# EAGLE board Gleisbesetzmeldung (EAGLE 8.1.0)
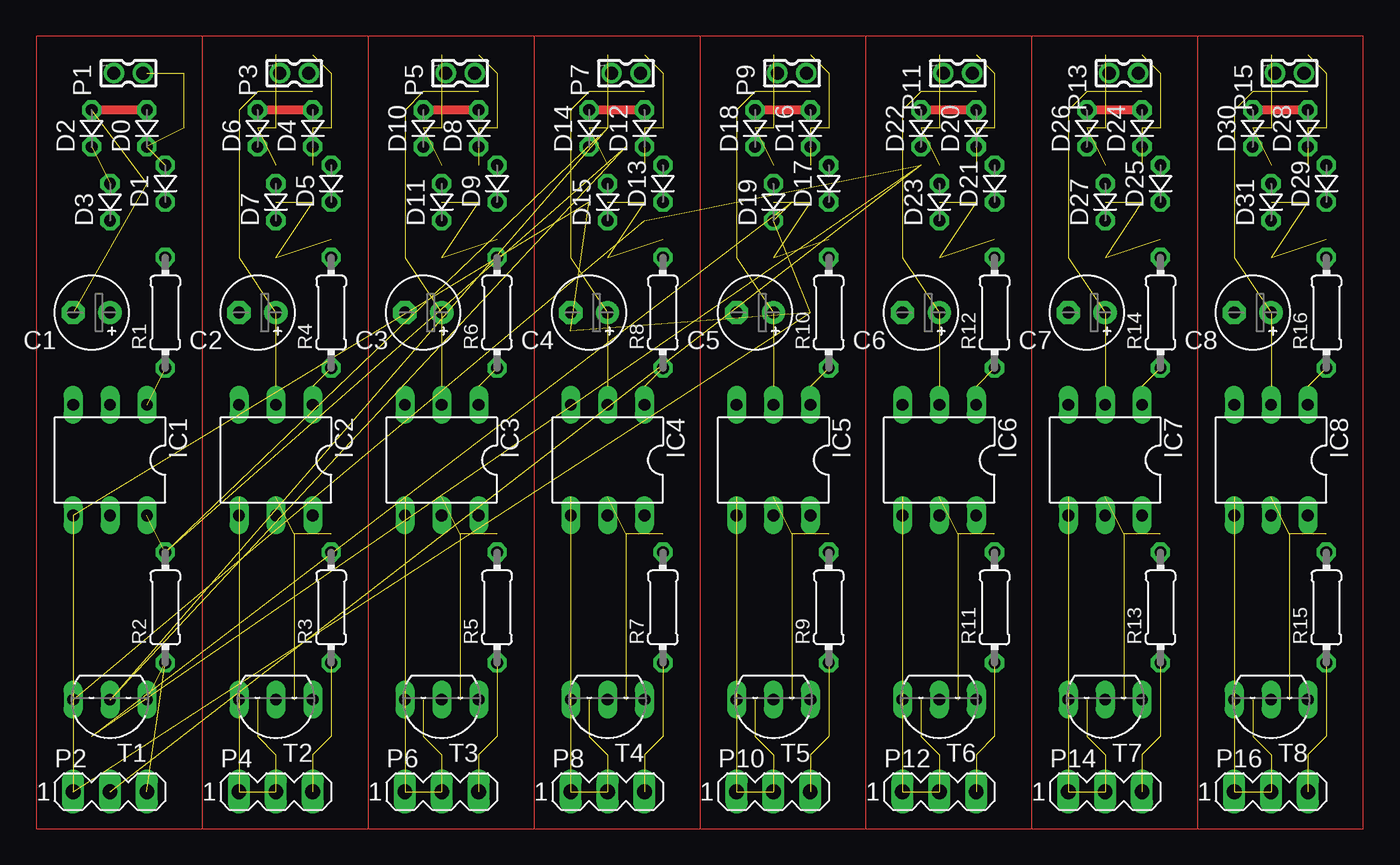
[diagram p0: board, top side]
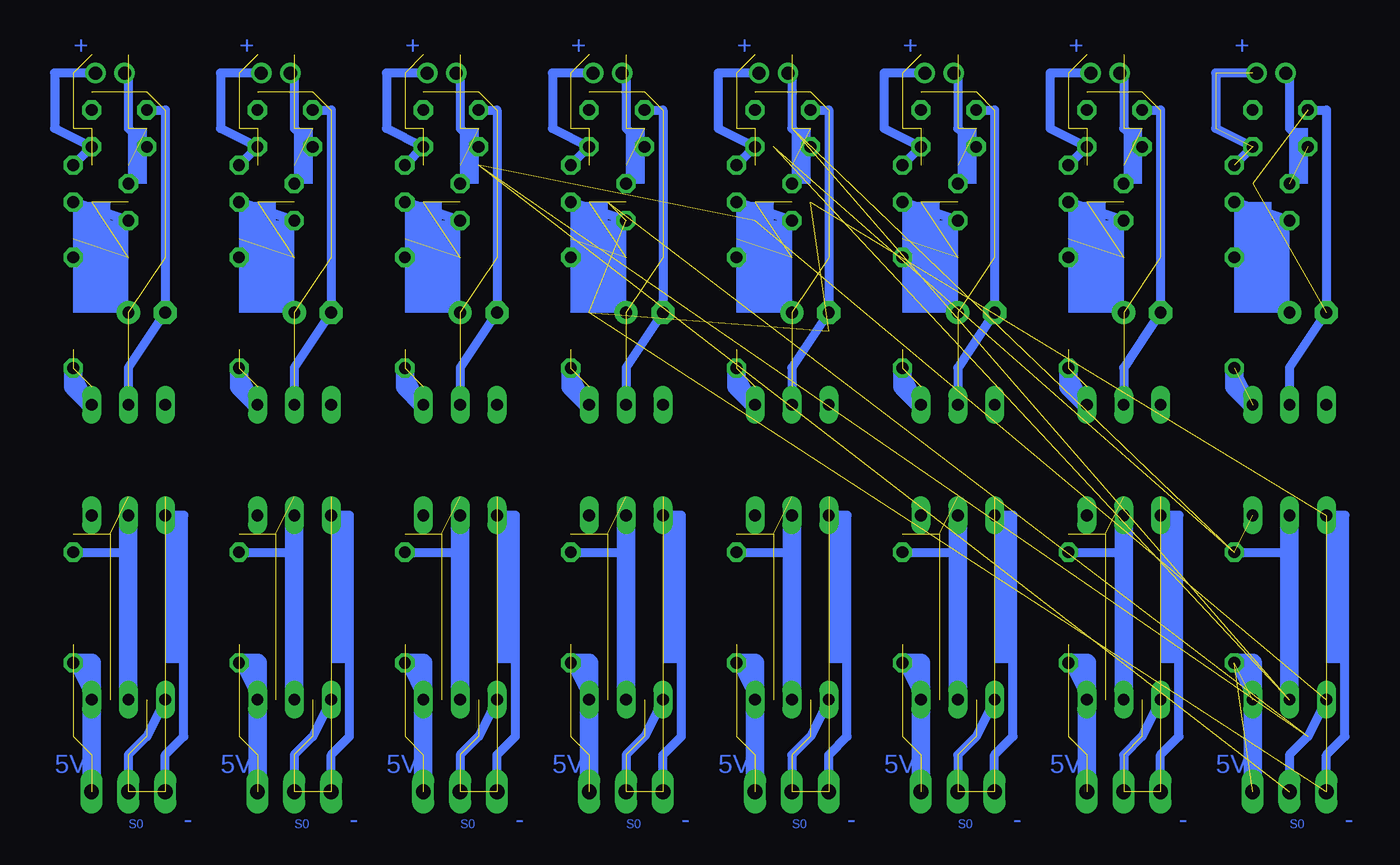
[diagram p1: board, bottom side, seen from below]

No outline drawn. Coordinates in mm, seen from the top.
Copper layers (1*16): Top 0.035mm / dielectric 1.5mm / Bottom 0.035mm
Design rules "default": minimum track width 10mil, minimum drill 24mil, track to track 8mil, track to pad 8mil, pad to pad 8mil, via to via 8mil, smd to smd 8mil, copper to edge 40mil, drill to drill 8mil, minimum pad ring 10mil, minimum via ring 8mil, stop-mask expansion 4mil, vias tented up to drill 0mil, thermal gap 10mil

## Footprints (pad centres in the part's own frame; a part is rotated, then mirrored left to right if it is on the bottom)
E2,5-5 = drill 0.813 pad 1.6: + -1.27,0 | drill 0.813 pad 1.6 octagon: - 1.27,0
D-2.5 = drill 0.813 octagon: A 1.27,0; C -1.27,0
DIL06 = drill 0.813 long: 1 -2.54,-3.81; 2 0,-3.81; 3 2.54,-3.81; 4 2.54,3.81; 5 0,3.81; 6 -2.54,3.81
87758-0216 = drill 0.9 pad 1.27: 1 0,-1; 2 0,1
MA03-1 = drill 1.016 long: 1 -2.54,0; 2 0,0; 3 2.54,0
0204/7 = drill 0.813 octagon: 1 -3.81,0; 2 3.81,0
TO92-CBE = drill 0.813 long: B 0,0; C -2.54,0; E 2.54,0

## Placement (x,y rotation side)
C1  22uF, 35V  [E2,5-5]  3.81,35.56 180 top
C2  22uF, 35V  [E2,5-5]  15.24,35.56 180 top
C3  22uF, 35V  [E2,5-5]  26.67,35.56 180 top
C4  22uF, 35V  [E2,5-5]  38.1,35.56 180 top
C5  22uF, 35V  [E2,5-5]  49.53,35.56 180 top
C6  22uF, 35V  [E2,5-5]  60.96,35.56 180 top
C7  22uF, 35V  [E2,5-5]  72.39,35.56 180 top
C8  22uF, 35V  [E2,5-5]  83.82,35.56 180 top
D0  [D-2.5]  7.62,48.26 90 top
D1  [D-2.5]  8.89,44.45 90 top
D2  [D-2.5]  3.81,48.26 90 top
D3  [D-2.5]  5.08,43.18 90 top
D4  [D-2.5]  19.05,48.26 90 top
D5  [D-2.5]  20.32,44.45 90 top
D6  [D-2.5]  15.24,48.26 90 top
D7  [D-2.5]  16.51,43.18 90 top
D8  [D-2.5]  30.48,48.26 90 top
D9  [D-2.5]  31.75,44.45 90 top
D10  [D-2.5]  26.67,48.26 90 top
D11  [D-2.5]  27.94,43.18 90 top
D12  [D-2.5]  41.91,48.26 90 top
D13  [D-2.5]  43.18,44.45 90 top
D14  [D-2.5]  38.1,48.26 90 top
D15  [D-2.5]  39.37,43.18 90 top
D16  [D-2.5]  53.34,48.26 90 top
D17  [D-2.5]  54.61,44.45 90 top
D18  [D-2.5]  49.53,48.26 90 top
D19  [D-2.5]  50.8,43.18 90 top
D20  [D-2.5]  64.77,48.26 90 top
D21  [D-2.5]  66.04,44.45 90 top
D22  [D-2.5]  60.96,48.26 90 top
D23  [D-2.5]  62.23,43.18 90 top
D24  [D-2.5]  76.2,48.26 90 top
D25  [D-2.5]  77.47,44.45 90 top
D26  [D-2.5]  72.39,48.26 90 top
D27  [D-2.5]  73.66,43.18 90 top
D28  [D-2.5]  87.63,48.26 90 top
D29  [D-2.5]  88.9,44.45 90 top
D30  [D-2.5]  83.82,48.26 90 top
D31  [D-2.5]  85.09,43.18 90 top
IC1  CNY-17-2  [DIL06]  5.08,25.4 180 top
IC2  CNY-17-2  [DIL06]  16.51,25.4 180 top
IC3  CNY-17-2  [DIL06]  27.94,25.4 180 top
IC4  CNY-17-2  [DIL06]  39.37,25.4 180 top
IC5  CNY-17-2  [DIL06]  50.8,25.4 180 top
IC6  CNY-17-2  [DIL06]  62.23,25.4 180 top
IC7  CNY-17-2  [DIL06]  73.66,25.4 180 top
IC8  CNY-17-2  [DIL06]  85.09,25.4 180 top
P1  [87758-0216]  6.35,52.07 270 top
P2  [MA03-1]  5.08,2.54 0 top
P3  [87758-0216]  17.78,52.07 270 top
P4  [MA03-1]  16.51,2.54 0 top
P5  [87758-0216]  29.21,52.07 270 top
P6  [MA03-1]  27.94,2.54 0 top
P7  [87758-0216]  40.64,52.07 270 top
P8  [MA03-1]  39.37,2.54 0 top
P9  [87758-0216]  52.07,52.07 270 top
P10  [MA03-1]  50.8,2.54 0 top
P11  [87758-0216]  63.5,52.07 270 top
P12  [MA03-1]  62.23,2.54 0 top
P13  [87758-0216]  74.93,52.07 270 top
P14  [MA03-1]  73.66,2.54 0 top
P15  [87758-0216]  86.36,52.07 270 top
P16  [MA03-1]  85.09,2.54 0 top
R1  1k  [0204/7]  8.89,35.56 90 top
R2  1k  [0204/7]  8.89,15.24 90 top
R3  1k  [0204/7]  20.32,15.24 90 top
R4  1k  [0204/7]  20.32,35.56 90 top
R5  1k  [0204/7]  31.75,15.24 90 top
R6  1k  [0204/7]  31.75,35.56 90 top
R7  1k  [0204/7]  43.18,15.24 90 top
R8  1k  [0204/7]  43.18,35.56 90 top
R9  1k  [0204/7]  54.61,15.24 90 top
R10  1k  [0204/7]  54.61,35.56 90 top
R11  1k  [0204/7]  66.04,15.24 90 top
R12  1k  [0204/7]  66.04,35.56 90 top
R13  1k  [0204/7]  77.47,15.24 90 top
R14  1k  [0204/7]  77.47,35.56 90 top
R15  1k  [0204/7]  88.9,15.24 90 top
R16  1k  [0204/7]  88.9,35.56 90 top
T1  [TO92-CBE]  5.08,8.89 180 top
T2  [TO92-CBE]  16.51,8.89 180 top
T3  [TO92-CBE]  27.94,8.89 180 top
T4  [TO92-CBE]  39.37,8.89 180 top
T5  [TO92-CBE]  50.8,8.89 180 top
T6  [TO92-CBE]  62.23,8.89 180 top
T7  [TO92-CBE]  73.66,8.89 180 top
T8  [TO92-CBE]  85.09,8.89 180 top

## Library data of the parts
C1-C8 R1-R16 = rcl
D0 D1-D31 = diode
IC1-IC8 = ic-package
P1 P3 P5 P7 P9 P11 P13 P15 = con-molex
P2 P4 P6 P8 P10 P12 P14 P16 = con-lstb
T1-T8 = transistor-neu-to92

## Nets
S$2: D0.C D1.A
S$3: P2.3 R2.1 T1.C
S$4: IC1.5 IC1.6 R2.2 T1.B
S$5: D2.C D3.A
S$6: C1.- D0.A D2.A IC1.2
S$7: C1.+ D1.C D3.C R1.2
S$8: IC1.1 R1.1
S$11: IC1.4 P2.1 P2.2 T1.E
S$66: D4.C D5.A
S$67: D6.C D7.A
S$68: C2.- D4.A D6.A IC2.2
S$69: C2.+ D5.C D7.C R4.2
S$70: IC2.1 R4.1
S$71: P4.3 R3.1 T2.C
S$72: IC2.5 IC2.6 R3.2 T2.B
S$73: IC2.4 P4.1 P4.2 T2.E
S$74: D8.C D9.A
S$75: D10.C D11.A
S$76: C3.- D8.A D10.A IC3.2
S$77: C3.+ D9.C D11.C R6.2
S$78: IC3.1 R6.1
S$79: P6.3 R5.1 T3.C
S$80: IC3.5 IC3.6 R5.2 T3.B
S$81: IC3.4 P6.1 P6.2 T3.E
S$82: D12.C D13.A
S$83: D14.C D15.A
S$84: C4.- D12.A D14.A IC4.2
S$85: C4.+ D13.C D15.C R8.2
S$86: IC4.1 R8.1
S$87: P8.3 R7.1 T4.C
S$88: IC4.5 IC4.6 R7.2 T4.B
S$89: IC4.4 P8.1 P8.2 T4.E
S$90: D16.C D17.A
S$91: D18.C D19.A
S$92: C5.- D16.A D18.A IC5.2
S$93: C5.+ D17.C D19.C R10.2
S$94: IC5.1 R10.1
S$95: P10.3 R9.1 T5.C
S$96: IC5.5 IC5.6 R9.2 T5.B
S$97: IC5.4 P10.1 P10.2 T5.E
S$98: D20.C D21.A
S$99: D22.C D23.A
S$100: C6.- D20.A D22.A IC6.2
S$101: C6.+ D21.C D23.C R12.2
S$102: IC6.1 R12.1
S$103: P12.3 R11.1 T6.C
S$104: IC6.5 IC6.6 R11.2 T6.B
S$105: IC6.4 P12.1 P12.2 T6.E
S$106: D24.C D25.A
S$107: D26.C D27.A
S$108: C7.- D24.A D26.A IC7.2
S$109: C7.+ D25.C D27.C R14.2
S$110: IC7.1 R14.1
S$111: P14.3 R13.1 T7.C
S$112: IC7.5 IC7.6 R13.2 T7.B
S$113: IC7.4 P14.1 P14.2 T7.E
S$114: D28.C D29.A
S$115: D30.C D31.A
S$116: C8.- D28.A D30.A IC8.2
S$117: C8.+ D29.C D31.C R16.2
S$118: IC8.1 R16.1
S$119: P16.3 R15.1 T8.C
S$120: IC8.5 IC8.6 R15.2 T8.B
S$121: IC8.4 P16.1 P16.2 T8.E

## Tracks (layer width: path | path; a pad name or v marks a point on that pad's centre or on a via)
S$1
  Top 0: 11.43,0 0,0 0,54.61 11.43,54.61 | 11.43,0 22.86,0 | 22.86,0 34.29,0 | 34.29,0 45.72,0 | 45.72,0 57.15,0 | 57.15,0 68.58,0 | 68.58,0 80.01,0 | 80.01,0 91.44,0 91.44,54.61 80.01,54.61 | 80.01,54.61 68.58,54.61 | 68.58,54.61 57.15,54.61 | 57.15,54.61 45.72,54.61 | 45.72,54.61 34.29,54.61 | 34.29,54.61 22.86,54.61 | 22.86,54.61 11.43,54.61 | 11.43,54.61 11.43,0 | 22.86,54.61 22.86,0 | 34.29,54.61 34.29,0 | 45.72,54.61 45.72,0 | 57.15,54.61 57.15,0 | 68.58,54.61 68.58,0 | 80.01,54.61 80.01,0
S$2  (4 unrouted)
  Bottom 0.61: 7.62,52.07 10.16,52.07 10.16,48.26 D0.C D1.A
S$3  (2 unrouted)
  Bottom 0.61: R2.1 T1.C
  Bottom 1.27: P2.3 T1.C 7.62,11.43 R2.1
S$4  (6 unrouted)
  Bottom 0.61: 5.08,19.05 IC1.5 | R2.2 5.08,19.05 | 5.08,19.05 T1.B
  Bottom 1.27: IC1.5 T1.B
S$5  (1 unrouted)
  Bottom 0.61: D3.A D2.C 5.08,48.26 5.08,52.07
S$6  (2 unrouted)
  Top 0.61: D0.A D2.A
  Bottom 0.61: IC1.2 5.08,31.75 C1.- 2.54,49.53 D2.A
S$7
  Bottom 0.61: D3.C D1.C C1.+ R1.2
S$8  (1 unrouted)
  Bottom 0.61: R1.1 IC1.1
  Bottom 1.27: R1.1 8.89,30.48 IC1.1
S$9  (4 unrouted)
S$10  (3 unrouted)
S$11  (15 unrouted)
  Bottom 0.61: T1.E 3.81,6.35 5.08,5.08 P2.2 | P2.1 2.54,5.08 1.27,6.35 1.27,21.59 IC1.4
S$12  (6 unrouted)
S$13  (3 unrouted)
S$14  (2 unrouted)
S$15  (4 unrouted)
S$16  (3 unrouted)
S$17  (5 unrouted)
S$18  (4 unrouted)
S$19  (3 unrouted)
S$20  (6 unrouted)
S$21  (3 unrouted)
S$22  (2 unrouted)
S$23  (4 unrouted)
S$24  (3 unrouted)
S$25  (5 unrouted)
S$26  (4 unrouted)
S$27  (3 unrouted)
S$28  (6 unrouted)
S$29  (3 unrouted)
S$30  (2 unrouted)
S$31  (4 unrouted)
S$32  (3 unrouted)
S$33  (5 unrouted)
S$34  (4 unrouted)
S$35  (3 unrouted)
S$36  (6 unrouted)
S$37  (3 unrouted)
S$38  (2 unrouted)
S$39  (4 unrouted)
S$40  (3 unrouted)
S$41  (5 unrouted)
S$42  (4 unrouted)
S$43  (3 unrouted)
S$44  (6 unrouted)
S$45  (3 unrouted)
S$46  (2 unrouted)
S$47  (4 unrouted)
S$48  (3 unrouted)
S$49  (5 unrouted)
S$50  (4 unrouted)
S$51  (3 unrouted)
S$52  (6 unrouted)
S$53  (3 unrouted)
S$54  (2 unrouted)
S$55  (4 unrouted)
S$56  (3 unrouted)
S$57  (5 unrouted)
S$58  (4 unrouted)
S$59  (3 unrouted)
S$60  (6 unrouted)
S$61  (3 unrouted)
S$62  (2 unrouted)
S$63  (4 unrouted)
S$64  (3 unrouted)
S$65  (5 unrouted)
S$66
  Bottom 0.61: 19.05,52.07 21.59,52.07 21.59,48.26 D4.C D5.A
S$67
  Bottom 0.61: D7.A D6.C 16.51,48.26 16.51,52.07
S$68
  Top 0.61: D4.A D6.A
  Bottom 0.61: IC2.2 16.51,31.75 C2.- 13.97,49.53 D6.A
S$69
  Bottom 0.61: D7.C D5.C C2.+ R4.2
S$70
  Bottom 0.61: R4.1 IC2.1
  Bottom 1.27: R4.1 20.32,30.48 IC2.1
S$71
  Bottom 0.61: R3.1 T2.C
  Bottom 1.27: P4.3 T2.C 19.05,11.43 R3.1
S$72
  Bottom 0.61: 16.51,19.05 IC2.5 | R3.2 16.51,19.05 | 16.51,19.05 T2.B
  Bottom 1.27: IC2.5 T2.B
S$73
  Bottom 0.61: T2.E 15.24,6.35 16.51,5.08 P4.2 | P4.1 13.97,5.08 12.7,6.35 12.7,21.59 IC2.4
S$74
  Bottom 0.61: 30.48,52.07 33.02,52.07 33.02,48.26 D8.C D9.A
S$75
  Bottom 0.61: D11.A D10.C 27.94,48.26 27.94,52.07
S$76
  Top 0.61: D8.A D10.A
  Bottom 0.61: IC3.2 27.94,31.75 C3.- 25.4,49.53 D10.A
S$77
  Bottom 0.61: D11.C D9.C C3.+ R6.2
S$78
  Bottom 0.61: R6.1 IC3.1
  Bottom 1.27: R6.1 31.75,30.48 IC3.1
S$79
  Bottom 0.61: R5.1 T3.C
  Bottom 1.27: P6.3 T3.C 30.48,11.43 R5.1
S$80
  Bottom 0.61: 27.94,19.05 IC3.5 | R5.2 27.94,19.05 | 27.94,19.05 T3.B
  Bottom 1.27: T3.B IC3.5
S$81
  Bottom 0.61: T3.E 26.67,6.35 27.94,5.08 P6.2 | P6.1 25.4,5.08 24.13,6.35 24.13,21.59 IC3.4
S$82
  Bottom 0.61: 41.91,52.07 44.45,52.07 44.45,48.26 D12.C D13.A
S$83
  Bottom 0.61: D15.A D14.C 39.37,48.26 39.37,52.07
S$84
  Top 0.61: D12.A D14.A
  Bottom 0.61: IC4.2 39.37,31.75 C4.- 36.83,49.53 D14.A
S$85
  Bottom 0.61: D15.C D13.C C4.+ R8.2
S$86
  Bottom 0.61: R8.1 IC4.1
  Bottom 1.27: R8.1 43.18,30.48 IC4.1
S$87
  Bottom 0.61: R7.1 T4.C
  Bottom 1.27: P8.3 T4.C 41.91,11.43 R7.1
S$88
  Bottom 0.61: 39.37,19.05 IC4.5 | R7.2 39.37,19.05 | 39.37,19.05 T4.B
  Bottom 1.27: IC4.5 T4.B
S$89
  Bottom 0.61: T4.E 38.1,6.35 39.37,5.08 P8.2 | P8.1 36.83,5.08 35.56,6.35 35.56,21.59 IC4.4
S$90
  Bottom 0.61: 53.34,52.07 55.88,52.07 55.88,48.26 D16.C D17.A
S$91
  Bottom 0.61: D19.A D18.C 50.8,48.26 50.8,52.07
S$92
  Top 0.61: D16.A D18.A
  Bottom 0.61: IC5.2 50.8,31.75 C5.- 48.26,49.53 D18.A
S$93
  Bottom 0.61: D19.C D17.C C5.+ R10.2
S$94
  Bottom 0.61: R10.1 IC5.1
  Bottom 1.27: R10.1 54.61,30.48 IC5.1
S$95
  Bottom 0.61: R9.1 T5.C
  Bottom 1.27: P10.3 T5.C 53.34,11.43 R9.1
S$96
  Bottom 0.61: 50.8,19.05 IC5.5 | R9.2 50.8,19.05 | 50.8,19.05 T5.B
  Bottom 1.27: T5.B IC5.5
S$97
  Bottom 0.61: T5.E 49.53,6.35 50.8,5.08 P10.2 | P10.1 48.26,5.08 46.99,6.35 46.99,21.59 IC5.4
S$98
  Bottom 0.61: 64.77,52.07 67.31,52.07 67.31,48.26 D20.C D21.A
S$99
  Bottom 0.61: D23.A D22.C 62.23,48.26 62.23,52.07
S$100
  Top 0.61: D20.A D22.A
  Bottom 0.61: IC6.2 62.23,31.75 C6.- 59.69,49.53 D22.A
S$101
  Bottom 0.61: D23.C D21.C C6.+ R12.2
S$102
  Bottom 0.61: R12.1 IC6.1
  Bottom 1.27: R12.1 66.04,30.48 IC6.1
S$103
  Bottom 0.61: R11.1 T6.C
  Bottom 1.27: P12.3 T6.C 64.77,11.43 R11.1
S$104
  Bottom 0.61: 62.23,19.05 IC6.5 | R11.2 62.23,19.05 | 62.23,19.05 T6.B
  Bottom 1.27: IC6.5 T6.B
S$105
  Bottom 0.61: T6.E 60.96,6.35 62.23,5.08 P12.2 | P12.1 59.69,5.08 58.42,6.35 58.42,21.59 IC6.4
S$106
  Bottom 0.61: 76.2,52.07 78.74,52.07 78.74,48.26 D24.C D25.A
S$107
  Bottom 0.61: D27.A D26.C 73.66,48.26 73.66,52.07
S$108
  Top 0.61: D24.A D26.A
  Bottom 0.61: IC7.2 73.66,31.75 C7.- 71.12,49.53 D26.A
S$109
  Bottom 0.61: D27.C D25.C C7.+ R14.2
S$110
  Bottom 0.61: R14.1 IC7.1
  Bottom 1.27: R14.1 77.47,30.48 IC7.1
S$111
  Bottom 0.61: R13.1 T7.C
  Bottom 1.27: P14.3 T7.C 76.2,11.43 R13.1
S$112
  Bottom 0.61: 73.66,19.05 73.66,20.32 | R13.2 73.66,19.05 | 73.66,19.05 T7.B
  Bottom 1.27: T7.B 73.66,20.32 IC7.5
S$113
  Bottom 0.61: T7.E 72.39,6.35 73.66,5.08 P14.2 | P14.1 71.12,5.08 69.85,6.35 69.85,21.59 IC7.4
S$114
  Bottom 0.61: 87.63,52.07 90.17,52.07 90.17,48.26 D28.C D29.A
S$115
  Bottom 0.61: D31.A D30.C 85.09,48.26 85.09,52.07
S$116
  Top 0.61: D28.A D30.A
  Bottom 0.61: IC8.2 85.09,31.75 C8.- 82.55,49.53 D30.A
S$117
  Bottom 0.61: D31.C D29.C C8.+ R16.2
S$118
  Bottom 0.61: R16.1 IC8.1
  Bottom 1.27: R16.1 88.9,30.48 IC8.1
S$119
  Bottom 0.61: R15.1 T8.C
  Bottom 1.27: P16.3 T8.C 87.63,11.43 R15.1
S$120
  Bottom 0.61: 85.09,19.05 IC8.5 | R15.2 85.09,19.05 | 85.09,19.05 T8.B
  Bottom 1.27: T8.B IC8.5
S$121
  Bottom 0.61: T8.E 83.82,6.35 85.09,5.08 P16.2 | P16.1 82.55,5.08 81.28,6.35 81.28,21.59 IC8.4
(copper drawn outside any net)
  shapes: Bottom area x34

## Text on the board
Bottom: + | + | + | + | + | + | + | + | 5V | 5V | 5V | 5V | 5V | 5V | 5V | 5V | - | S0 | - | - | S0 | - | S0 | - | S0 | - | S0 | - | S0 | - | S0